# Altium PCB LED_PCB_LONG.PcbDoc
Units mil, origin at the board's own origin, x right, y up, seen from the top; angles counter-clockwise.
Board outline 11604 x 2990 mil, 2 copper layers (Top Layer, Bottom Layer); 73 components, 41 nets, 228 pads, 278 vias.
Unrouted connection lines stored in the file: 28.
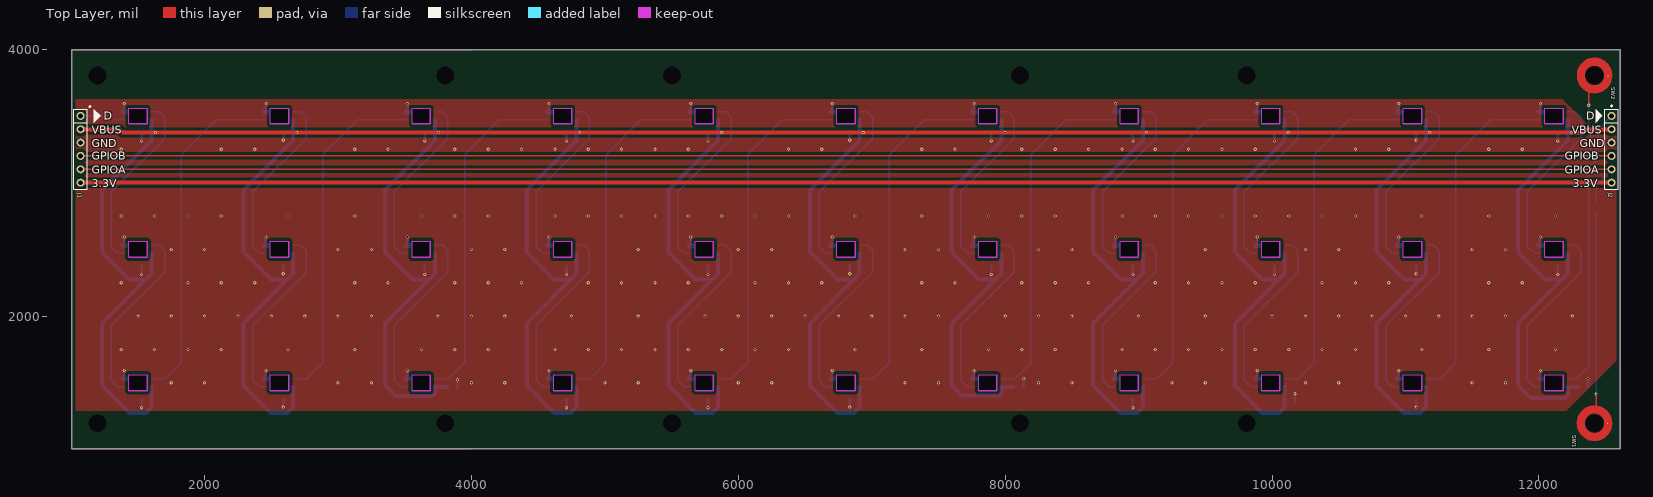
[diagram p0: Top Layer view]
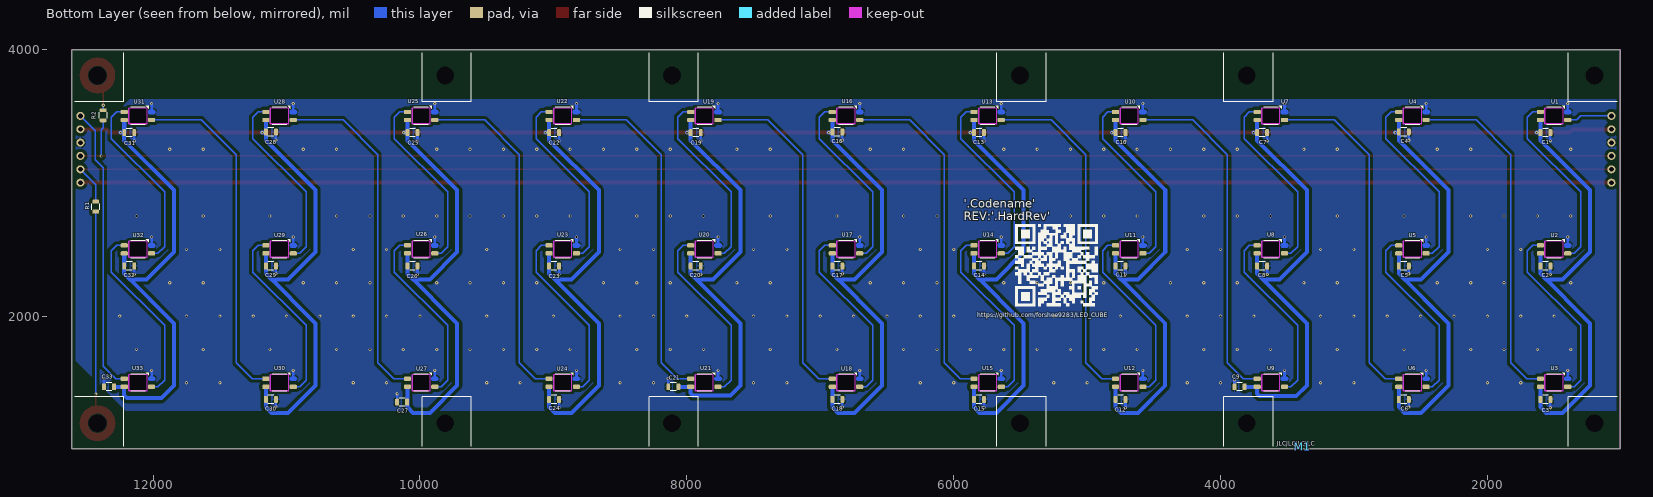
[diagram p1: Bottom Layer view, seen from below]

## Layer stack, top to bottom
Top Solder: solder mask 0.4, Solder Resist, Dk 3.5
Top Layer: signal copper 1.4
Dielectric 1: dielectric 12.6, FR-4, Dk 4.8
Bottom Layer: signal copper 1.4
Bottom Solder: solder mask 0.4, Solder Resist, Dk 3.5

## Board outline
1005,1005 1005,3995 12609,3995 12609,1005
cut-out: 3554.8,1559.05 3690.8,1559.05 3690.8,1440.94 3554.8,1440.94
cut-out: 12046,3559.05 12182,3559.05 12182,3440.94 12046,3440.94
cut-out: 12046,1559.05 12182,1559.05 12182,1440.94 12046,1440.94
cut-out: 12046,2559.05 12182,2559.05 12182,2440.94 12046,2440.94
cut-out: 10984.6,3559.05 11120.6,3559.05 11120.6,3440.94 10984.6,3440.94
cut-out: 10984.6,1559.05 11120.6,1559.05 11120.6,1440.94 10984.6,1440.94
cut-out: 10984.6,2559.05 11120.6,2559.05 11120.6,2440.94 10984.6,2440.94
cut-out: 9923.2,3559.05 10059.2,3559.05 10059.2,3440.94 9923.2,3440.94
cut-out: 9923.2,1559.05 10059.2,1559.05 10059.2,1440.94 9923.2,1440.94
cut-out: 9923.2,2559.05 10059.2,2559.05 10059.2,2440.94 9923.2,2440.94
cut-out: 8861.8,3559.05 8997.8,3559.05 8997.8,3440.94 8861.8,3440.94
cut-out: 8861.8,1559.05 8997.8,1559.05 8997.8,1440.94 8861.8,1440.94
cut-out: 8861.8,2559.05 8997.8,2559.05 8997.8,2440.94 8861.8,2440.94
cut-out: 7800.4,3559.05 7936.4,3559.05 7936.4,3440.94 7800.4,3440.94
cut-out: 7800.4,1559.05 7936.4,1559.05 7936.4,1440.94 7800.4,1440.94
cut-out: 7800.4,2559.05 7936.4,2559.05 7936.4,2440.94 7800.4,2440.94
cut-out: 6739,3559.05 6875,3559.05 6875,3440.94 6739,3440.94
cut-out: 6739,1559.05 6875,1559.05 6875,1440.94 6739,1440.94
cut-out: 6739,2559.05 6875,2559.05 6875,2440.94 6739,2440.94
cut-out: 5677.6,3559.05 5813.6,3559.05 5813.6,3440.94 5677.6,3440.94
cut-out: 5677.6,1559.05 5813.6,1559.05 5813.6,1440.94 5677.6,1440.94
cut-out: 5677.6,2559.05 5813.6,2559.05 5813.6,2440.94 5677.6,2440.94
cut-out: 4616.2,3559.05 4752.2,3559.05 4752.2,3440.94 4616.2,3440.94
cut-out: 4616.2,1559.05 4752.2,1559.05 4752.2,1440.94 4616.2,1440.94
cut-out: 4616.2,2559.05 4752.2,2559.05 4752.2,2440.94 4616.2,2440.94
cut-out: 3554.8,3559.05 3690.8,3559.05 3690.8,3440.94 3554.8,3440.94
cut-out: 3554.8,2559.05 3690.8,2559.05 3690.8,2440.94 3554.8,2440.94
cut-out: 2493.4,2559.05 2629.4,2559.05 2629.4,2440.94 2493.4,2440.94
cut-out: 2493.4,1559.05 2629.4,1559.05 2629.4,1440.94 2493.4,1440.94
cut-out: 1432,1559.05 1568,1559.05 1568,1440.94 1432,1440.94
cut-out: 1432,2559.05 1568,2559.05 1568,2440.94 1432,2440.94
cut-out: 2493.4,3559.05 2629.4,3559.05 2629.4,3440.94 2493.4,3440.94
cut-out: 1432,3559.05 1568,3559.05 1568,3440.94 1432,3440.94
cut-out: 1432,3559.05 1568,3559.05 1568,3440.94 1432,3440.94

## Design rules (kind name [scope] priority, off if disabled: settings)
Clearance Clearance_Poly [All vs InPoly] p1: gap=25 ignorepadtopadclearanceinfootprint=FALSE
Clearance [All] p2: gap=5 ignorepadtopadclearanceinfootprint=FALSE except(0: Arc-Hole Track-Hole SMDPad-Hole THPad-Hole Via-Hole Fill-Hole Poly-Hole Region-Hole Text-Hole)
HoleSize [All] p1: absolutevalues=TRUE maxlimit=99999 minlimit=1 maxpercent=80.000 minpercent=20.000
PlaneConnect [All] p1: pad.planeconnectstyle=Relief pad.reliefexpansion=20 pad.reliefentries=4 pad.reliefconductorwidth=10 pad.reliefairgap=10 via.planeconnectstyle=Direct via.reliefexpansion=20 via.reliefentries=4 via.reliefconductorwidth=10 via.reliefairgap=10
PolygonConnect [All] p1: thpad.connectstyle=Relief thpad.reliefconductorwidth=10 thpad.reliefentries=4 thpad.polygonreliefangle="90 Angle" thpad.airgapwidth=10 smdpad.connectstyle=Relief smdpad.reliefconductorwidth=10 smdpad.reliefentries=4 smdpad.polygonreliefangle="90 Angle" smdpad.airgapwidth=10 via.connectstyle=Direct via.reliefconductorwidth=10 via.reliefentries=4 via.polygonreliefangle="90 Angle" via.airgapwidth=10
RoutingVias [All] p1: holewidth=28 width=50 viastyle="Through Hole" minholewidth=28 minwidth=50 maxholewidth=28 maxwidth=50
SilkToSolderMaskClearance [IsPad] p1: minsilkscreentomaskgap=0 clearancetoexposedcopper=TRUE
SolderMaskExpansion [All] p1: expansion=4 istentingtop=FALSE
SupplyNets "Schematic Supply Nets_2" [InNet('3.3V')] p1: voltage=0.000
SupplyNets "Schematic Supply Nets_1" [InNet('USB_VBUS')] p2: voltage=0.000
SupplyNets "Schematic Supply Nets" [InNet('GND')] p3: voltage=0.000
Width [All] p1: maxlimit=10000 minlimit=6 preferedwidth=10
27 further rules are at their usual default settings.

## Components (designator, comment, footprint, x,y, rotation, side; value= is the part's Value field where it differs from the comment)
C1 "0.1µF" Chip0805 1565,3375 r0 bottom
C2 "0.1µF" Chip0805 1565,2375 r0 bottom
C3 "0.1µF" Chip0805 1565,1375 r0 bottom
C4 "0.1µF" Chip0805 2626.4,3380 r0 bottom
C5 "0.1µF" Chip0805 2626.4,2375 r0 bottom
C6 "0.1µF" Chip0805 2626.4,1375 r0 bottom
C7 "0.1µF" Chip0805 3687.8,3375 r0 bottom
C8 "0.1µF" Chip0805 3687.8,2375 r0 bottom
C9 "0.1µF" Chip0805 3857.2,1470 r180 bottom
C10 "0.1µF" Chip0805 4749.2,3375 r0 bottom
C11 "0.1µF" Chip0805 4749.2,2375 r0 bottom
C12 "0.1µF" Chip0805 4749.2,1375 r0 bottom
C13 "0.1µF" Chip0805 5810.6,3375 r0 bottom
C14 "0.1µF" Chip0805 5810.6,2375 r0 bottom
C15 "0.1µF" Chip0805 5810.6,1375 r0 bottom
C16 "0.1µF" Chip0805 6872,3380 r0 bottom
C17 "0.1µF" Chip0805 6872,2375 r0 bottom
C18 "0.1µF" Chip0805 6872,1375 r0 bottom
C19 "0.1µF" Chip0805 7933.4,3375 r0 bottom
C20 "0.1µF" Chip0805 7933.4,2375 r0 bottom
C21 "0.1µF" Chip0805 8101.6,1470 r180 bottom
C22 "0.1µF" Chip0805 8994.8,3375 r0 bottom
C23 "0.1µF" Chip0805 8994.8,2375 r0 bottom
C24 "0.1µF" Chip0805 8994.8,1375 r0 bottom
C25 "0.1µF" Chip0805 10056.2,3375 r0 bottom
C26 "0.1µF" Chip0805 10056.2,2375 r0 bottom
C27 "0.1µF" Chip0805 10133.8,1355 r180 bottom
C28 "0.1µF" Chip0805 11117.6,3380 r0 bottom
C29 "0.1µF" Chip0805 11117.6,2375 r0 bottom
C30 "0.1µF" Chip0805 11117.6,1375 r0 bottom
C31 "0.1µF" Chip0805 12179,3375 r0 bottom
C32 "0.1µF" Chip0805 12179,2375 r0 bottom
C33 "0.1µF" Chip0805 12331,1470 r180 bottom
J1 "HEADER_1x6_NO_BOM" HEADER_1x6_100mil_NP 1070,3250 r270 top locked
J2 "HEADER_1x6_NO_BOM" HEADER_1x6_100mil_NP 12545,3250 r270 top
M1 "JLC_NUMBER" JLC_NUMBER 3385,1020 r180 bottom
R1 "0" Chip0805 12430,2820 r90 bottom
R2 "0" Chip0805 12375,3505 r270 bottom
SW1 "TOUCH_PAD_NO_BOM" TENTED_PAD_5mil 12514,1195 r0 top
SW2 "TOUCH_PAD_NO_BOM" TENTED_PAD_5mil 12519,3800 r0 top
U1 "SK6812MINI-E" SK6812MINI-E 1500,3500 r0 bottom
U2 "SK6812MINI-E" SK6812MINI-E 1500,2500 r0 bottom
U3 "SK6812MINI-E" SK6812MINI-E 1500,1500 r0 bottom
U4 "SK6812MINI-E" SK6812MINI-E 2561.4,3500 r0 bottom
U5 "SK6812MINI-E" SK6812MINI-E 2561.4,2500 r0 bottom
U6 "SK6812MINI-E" SK6812MINI-E 2561.4,1500 r0 bottom
U7 "SK6812MINI-E" SK6812MINI-E 3622.8,3500 r0 bottom
U8 "SK6812MINI-E" SK6812MINI-E 3622.8,2500 r0 bottom
U9 "SK6812MINI-E" SK6812MINI-E 3622.8,1500 r0 bottom
U10 "SK6812MINI-E" SK6812MINI-E 4684.2,3500 r0 bottom
U11 "SK6812MINI-E" SK6812MINI-E 4684.2,2500 r0 bottom
U12 "SK6812MINI-E" SK6812MINI-E 4684.2,1500 r0 bottom
U13 "SK6812MINI-E" SK6812MINI-E 5745.6,3500 r0 bottom
U14 "SK6812MINI-E" SK6812MINI-E 5745.6,2500 r0 bottom
U15 "SK6812MINI-E" SK6812MINI-E 5745.6,1500 r0 bottom
U16 "SK6812MINI-E" SK6812MINI-E 6807,3500 r0 bottom
U17 "SK6812MINI-E" SK6812MINI-E 6807,2500 r0 bottom
U18 "SK6812MINI-E" SK6812MINI-E 6807,1500 r0 bottom
U19 "SK6812MINI-E" SK6812MINI-E 7868.4,3500 r0 bottom
U20 "SK6812MINI-E" SK6812MINI-E 7868.4,2500 r0 bottom
U21 "SK6812MINI-E" SK6812MINI-E 7868.4,1500 r0 bottom
U22 "SK6812MINI-E" SK6812MINI-E 8929.8,3500 r0 bottom
U23 "SK6812MINI-E" SK6812MINI-E 8929.8,2500 r0 bottom
U24 "SK6812MINI-E" SK6812MINI-E 8929.8,1500 r0 bottom
U25 "SK6812MINI-E" SK6812MINI-E 9991.2,3500 r0 bottom
U26 "SK6812MINI-E" SK6812MINI-E 9991.2,2500 r0 bottom
U27 "SK6812MINI-E" SK6812MINI-E 9991.2,1500 r0 bottom
U28 "SK6812MINI-E" SK6812MINI-E 11052.6,3500 r0 bottom
U29 "SK6812MINI-E" SK6812MINI-E 11052.6,2500 r0 bottom
U30 "SK6812MINI-E" SK6812MINI-E 11052.6,1500 r0 bottom
U31 "SK6812MINI-E" SK6812MINI-E 12114,3500 r0 bottom
U32 "SK6812MINI-E" SK6812MINI-E 12114,2500 r0 bottom
U33 "SK6812MINI-E" SK6812MINI-E 12114,1500 r0 bottom

## Footprints (in the part's own frame and the unit in brackets; to place one, negate y for a bottom-side part, rotate by r counter-clockwise, add the part's x,y. Pads: shape width x height; smd on the part's side, far side on the other; paste and mask are expansions set on the pad)
Chip0805 [mm] "Chip Resistor, 2-Leads, Body 2.05x1.25mm, IPC Medium Density"
  rrect50% 0.75x1.3 smd: 1(-0.955,0) 2(0.955,0)
  silkscreen extent -0.55,-0.77 0.55,0.77, body extent -0.95,-0.55 0.95,0.55, height 0.5
HEADER_1x6_100mil_NP [mil]
  round 60 hole 35: 1(-250,0) 2(-150,0) 3(-50,0) 4(50,0) 5(150,0) 6(250,0)
  silkscreen extent -325,-50 300,75
JLC_NUMBER [mil]
SK6812MINI-E [mil]
  rrect50% 54x32.28 smd: 1(102.53,30) 2(102.53,-30) 4(-102.53,30)
  round 1 smd: 3(-102.53,-30)
  Top Layer region: -83.6,-13.86 -75.53,-21.93 -75.53,-38.07 -83.6,-46.14 -121.46,-46.14 -129.53,-38.07 -129.53,-21.93 -121.46,-13.86
  Keep-Out Layer lines w1.97: -68,59.06 68,59.06 68,-59.06 -68,-59.06 -68,59.06
  silkscreen extent -80,-75 55,65, body extent -116,-55 116,55, height 38
TENTED_PAD_5mil [mil]
  round 5 smd mask+4: 1(0,0)

## Part data
C1 C2 C3 C4 C5 C6 C7 C8 C9 C10 C11 C12 C13 C14 C15 C16 C17 C18 C19 C20 C21 C22 C23 C24 C25 C26 C27 C28 C29 C30 C31 C32 C33: library part C2012X7T2E104K125AA, "CAP CER 0.1UF 250V 10% X7T 0805", Manufacturer="TDK Corporation", Operating Temperature="-55°C ~ 125°C", Package / Case="0805 (2012 Metric)", Ratings=-, Supplier Part Number 1=445-7749-1-ND, Temperature Coefficient=X7T, Tolerance=±10%, Voltage=250V, Applications="General Purpose", Capacitance=0.1µF, Features=-, Height - Seated (Max)=-, HelpURL=http://product.tdk.com/capacitor/mlcc/en/documents/mlcc_commercial_midvoltage_en.pdf, Lead Spacing=-, Lead Style=-, Manufacturer Part Number=C2012X7T2E104K125AA, Mounting Type="Surface Mount, MLCC", PartNumber=C2012X7T2E104K125AA, Series=C, Size / Dimension="0.079\" L x 0.049\" W (2.00mm x 1.25mm)", Supplier 1=Digi-Key, Supplier 2=Mouser, Thickness (Max)="0.057\" (1.45mm)"
M1: "JLC Order Number Location", Manufacturer Part Number=JLC_NUMBER, PartNumber=JLC_NUMBER
R1 R2: library part CRCW08050000Z0EA, "RES 0.0 OHM 1/8W JUMP 0805 SMD", Manufacturer="Vishay Dale", Package / Case="0805 (2012 Metric)", Power (Watts)="0.125W, 1/8W", Supplier Part Number 1=541-0.0ACT-ND, Temperature Coefficient=-, Tolerance=Jumper, Composition="Thick Film", Features="Automotive AEC-Q200 Qualified", Height="0.020\" (0.50mm)", HelpURL=http://www.vishay.com/doc?20035, Manufacturer Part Number=CRCW08050000Z0EA, Number of Terminations=2, PartNumber=CRCW08050000Z0EA, Resistance=0, Series=CRCW, Size / Dimension="0.079\" L x 0.049\" W (2.00mm x 1.25mm)", Supplier 1=Digi-Key, Supplier 2=Mouser, Supplier Device Package="0805 (2012 Metric)"
U1 U2 U3 U4 U5 U6 U7 U8 U9 U10 U11 U12 U13 U14 U15 U16 U17 U18 U19 U20 U21 U22 U23 U24 U25 U26 U27 U28 U29 U30 U31 U32 U33: "Addressable RGB LED", Manufacturer="Adafruit Industries LLC", Supplier Part Number 1=1528-4960-ND, Datasheets=https://cdn-shop.adafruit.com/product-files/4960/4960_SK6812MINI-E_REV02_EN.pdf, Manufacturer Part Number=SK6812MINI-E, PartNumber=SK6812MINI-E, Supplier 1=Digi-Key
J1 J2: Manufacturer Part Number=HEADER_1x6_NO_BOM, PartNumber=HEADER_1x6_NO_BOM
SW1 SW2: Manufacturer Part Number=TOUCH_PAD_NO_BOM, PartNumber=TOUCH_PAD_NO_BOM

## Free pads (board coordinates)
  round 10 hole 133.86 unplated: 0(1196.85,1196.85) 0(1196.85,3803.15) 0(3803.15,1196.85) 0(3803.15,3803.15) 0(5503.85,1196.85) 0(5503.85,3803.15) 0(8110.15,1196.85) 0(8110.15,3803.15) 0(9810.85,1196.85) 0(9810.85,3803.15) 0(12417.15,1196.85) 0(12417.15,3803.15)

## Via types
v1: diameter 24, hole 12, Top Layer to Bottom Layer, tented both sides, 278 vias

## Nets (pads, with @x,y where several pads share a name; then routed paths per layer and width w, separated by ;. In a path a pad name is that pad's centre, name@x,y a point inside that pad or via, vN(x,y) a via of type N, cw(c..) or ccw(c..) an arc to the next point about the centre after c; other vN are vias at no path point)
3.3V: J1.6 J2.6 | length 11475
  Top Layer w30: J1.6 J2.6
DATA_IN: J1.1 U1.4 | length 339.9
  Bottom Layer w10: J1.1 1300,3500 1330,3470 U1.4
DATA_OUT: J2.1 U33.2 | length 2143.2
  Bottom Layer w10: U33.2 12280,1530 12375,1625 12375,3110 12435,3170 12435,3390 J2.1
GND: C1.1 C2.1 C3.1 C4.1 C5.1 C6.1 C7.1 C8.1 C9.1 C10.1 C11.1 C12.1 C13.1 C14.1 C15.1 C16.1 C17.1 C18.1 C19.1 C20.1 C21.1 C22.1 C23.1 C24.1 C25.1 C26.1 C27.1 C28.1 C29.1 C30.1 C31.1 C32.1 C33.1 J1.3 J2.3 U1.3 U2.3 U3.3 U4.3 U5.3 U6.3 U7.3 U8.3 U9.3 U10.3 U11.3 U12.3 U13.3 U14.3 U15.3 U16.3 U17.3 U18.3 U19.3 U20.3 U21.3 U22.3 U23.3 U24.3 U25.3 U26.3 U27.3 U28.3 U29.3 U30.3 U31.3 U32.3 U33.3 | length 4122.7
  Bottom Layer w20: U3.3 v1(1397.47,1592.53) ; U2.3 v1(1397.47,2592.53) ; U1.3 v1(1397.47,3592.53) ; v1(1527.4,1312.6) C3.1 ; v1(1527.4,2312.6) C2.1 ; v1(1527.4,3312.6) C1.1 ; U6.3 v1(2458.87,1592.53) ; U5.3 v1(2458.87,2592.53) ; U4.3 v1(2458.87,3592.53) ; v1(2588.8,1317.6) C6.1@2588.8,1380 ; v1(2588.8,2317.6) C5.1@2588.8,2380 ; v1(2588.8,3317.6) C4.1 ; U9.3 v1(3520.27,1592.53) ; U8.3 v1(3520.27,2592.53) ; U7.3 v1(3520.27,3592.53) ; v1(3650.2,2312.6) C8.1 ; v1(3650.2,3312.6) C7.1 ; C9.1@3894.8,1460 v1(3894.8,1522.4) ; U12.3 v1(4581.67,1592.53) ; U11.3 v1(4581.67,2592.53) ; U10.3 v1(4581.67,3592.53) ; v1(4711.6,1312.6) C12.1 ; v1(4711.6,2312.6) C11.1 ; v1(4711.6,3312.6) C10.1 ; U15.3 v1(5643.07,1592.53) ; U14.3 v1(5643.07,2592.53) ; U13.3 v1(5643.07,3592.53) ; v1(5773,1312.6) C15.1 ; v1(5773,2312.6) C14.1 ; v1(5773,3312.6) C13.1 ; U18.3 v1(6704.47,1592.53) ; U17.3 v1(6704.47,2592.53) ; U16.3 v1(6704.47,3592.53) ; v1(6834.4,1317.6) C18.1@6834.4,1380 ; v1(6834.4,2317.6) C17.1@6834.4,2380 ; v1(6834.4,3317.6) C16.1 ; U21.3 v1(7765.87,1592.53) ; U20.3 v1(7765.87,2592.53) ; U19.3 v1(7765.87,3592.53) ; v1(7895.8,2312.6) C20.1 ; v1(7895.8,3312.6) C19.1 ; C21.1 v1(8139.2,1532.4) ; U24.3 v1(8827.27,1592.53) ; U23.3 v1(8827.27,2592.53) ; U22.3 v1(8827.27,3592.53) ; v1(8957.2,1312.6) C24.1 ; v1(8957.2,2312.6) C23.1 ; v1(8957.2,3312.6) C22.1 ; U27.3 v1(9888.67,1592.53) ; U26.3 v1(9888.67,2592.53) ; U25.3 v1(9888.67,3592.53) ; v1(10018.6,2312.6) C26.1 ; v1(10018.6,3312.6) C25.1 ; C27.1 v1(10171.4,1417.4) ; U30.3 v1(10950.07,1592.53) ; U29.3 v1(10950.07,2592.53) ; U28.3 v1(10950.07,3592.53) ; v1(11080,1317.6) C30.1@11080,1380 ; v1(11080,2317.6) C29.1@11080,2380 ; v1(11080,3317.6) C28.1 ; U33.3 v1(12011.47,1592.53) ; U32.3 v1(12011.47,2592.53) ; U31.3 v1(12011.47,3592.53) ; v1(12141.4,2312.6) C32.1 ; v1(12141.4,3312.6) C31.1 ; C33.1 v1(12368.6,1532.4)
  other v1: 1750,1500 2000,1500 3000,1500 3250,1500 4000,1500 4250,1500 5000,1500 5250,1500 6000,1500 6250,1500 7250,1500 7500,1500 8250,1500 8500,1500 9250,1500 9500,1500 10250,1500 10500,1500 11500,1500 11750,1500 1375,1750 1625,1750 1875,1750 2125,1750 2625,1750 3125,1750 3625,1750 3875,1750 4125,1750 4625,1750 4875,1750 5125,1750 5375,1750 5625,1750 5875,1750 6125,1750 6375,1750 6875,1750 7375,1750 7875,1750 8125,1750 8375,1750 8875,1750 9125,1750 9375,1750 9625,1750 9875,1750 10125,1750 10375,1750 10625,1750 11125,1750 11625,1750 12125,1750 1500,2000 1750,2000 2000,2000 2250,2000 2500,2000 2750,2000 3000,2000 3250,2000 3750,2000 4000,2000 4250,2000 4750,2000 5250,2000 5750,2000 6000,2000 6250,2000 6500,2000 6750,2000 7000,2000 7250,2000 7500,2000 8000,2000 8250,2000 8500,2000 9000,2000 9500,2000 10000,2000 10250,2000 10500,2000 10750,2000 11000,2000 11250,2000 11500,2000 11750,2000 12250,2000 1375,2250 1875,2250 2125,2250 2375,2250 3125,2250 3375,2250 3875,2250 4125,2250 4375,2250 4875,2250 5125,2250 5375,2250 5625,2250 6125,2250 6375,2250 6625,2250 7375,2250 7625,2250 8125,2250 8375,2250 8625,2250 9125,2250 9375,2250 9625,2250 9875,2250 10375,2250 10625,2250 10875,2250 11625,2250 11875,2250 1750,2500 2000,2500 3000,2500 3250,2500 4000,2500 4250,2500 5250,2500 6000,2500 6250,2500 7250,2500 7500,2500 8250,2500 8500,2500 9500,2500 10250,2500 10500,2500 11500,2500 11750,2500 1375,2750 1625,2750 1875,2750 2125,2750 2625,2750 3125,2750 3625,2750 3875,2750 4125,2750 4625,2750 4875,2750 5125,2750 5375,2750 5625,2750 5875,2750 6125,2750 6375,2750 6875,2750 7375,2750 7875,2750 8125,2750 8375,2750 8875,2750 9125,2750 9375,2750 9625,2750 9875,2750 10125,2750 10375,2750 10625,2750 11125,2750 11625,2750 12125,2750 1375,3250 2125,3250 2375,3250 3125,3250 3375,3250 3875,3250 4125,3250 4375,3250 4625,3250 4875,3250 5125,3250 5375,3250 5625,3250 6375,3250 6625,3250 7375,3250 7625,3250 8125,3250 8375,3250 8625,3250 8875,3250 9125,3250 9375,3250 9625,3250 9875,3250 10625,3250 10875,3250 11625,3250 11875,3250
GPIO_A: J1.5 J2.5 R1.2 | length 11765
  Top Layer w10: J1.5 J2.5
  Bottom Layer w10: R1.2 12430,2985 J2.5
GPIO_B: J1.4 J2.4 R2.2 | length 11748.6
  Top Layer w10: J1.4 J2.4
  Bottom Layer w10: R2.2 12375,3410 12390,3395 v1(12390,3200)
NetU1_2: U1.2 U2.4 | length 1367.9
  Bottom Layer w10: U2.4 1350,2470 1300,2520 1300,2930 1700,3330 1700,3490 1660,3530 U1.2
NetU2_2: U2.2 U3.4 | length 1367.9
  Bottom Layer w10: U3.4 1350,1470 1300,1520 1300,1930 1700,2330 1700,2490 1660,2530 U2.2
NetU3_2: U3.2 U4.4 | length 2573.7
  Bottom Layer w10: U3.2 1705,1530 1825,1650 1825,3210 2085,3470 U4.4
NetU4_2: U4.2 U5.4 | length 1367.9
  Bottom Layer w10: U5.4 2411.4,2470 2361.4,2520 2361.4,2930 2761.4,3330 2761.4,3490 2721.4,3530 U4.2
NetU5_2: U5.2 U6.4 | length 1367.9
  Bottom Layer w10: U6.4 2411.4,1470 2361.4,1520 2361.4,1930 2761.4,2330 2761.4,2490 2721.4,2530 U5.2
NetU6_2: U6.2 U7.4 | length 2573.7
  Bottom Layer w10: U6.2 2766.4,1530 2886.4,1650 2886.4,3210 3146.4,3470 U7.4
NetU7_2: U7.2 U8.4 | length 1367.9
  Bottom Layer w10: U8.4 3472.8,2470 3422.8,2520 3422.8,2930 3822.8,3330 3822.8,3490 3782.8,3530 U7.2
NetU8_2: U8.2 U9.4 | length 1367.9
  Bottom Layer w10: U9.4 3472.8,1470 3422.8,1520 3422.8,1930 3822.8,2330 3822.8,2490 3782.8,2530 U8.2
NetU9_2: U9.2 U10.4 | length 2573.7
  Bottom Layer w10: U9.2 3827.8,1530 3947.8,1650 3947.8,3210 4207.8,3470 U10.4
NetU10_2: U10.2 U11.4 | length 1367.9
  Bottom Layer w10: U11.4 4534.2,2470 4484.2,2520 4484.2,2930 4884.2,3330 4884.2,3490 4844.2,3530 U10.2
NetU11_2: U11.2 U12.4 | length 1367.9
  Bottom Layer w10: U12.4 4534.2,1470 4484.2,1520 4484.2,1930 4884.2,2330 4884.2,2490 4844.2,2530 U11.2
NetU12_2: U12.2 U13.4 | length 2573.7
  Bottom Layer w10: U12.2 4889.2,1530 5009.2,1650 5009.2,3210 5269.2,3470 U13.4
NetU13_2: U13.2 U14.4 | length 1367.9
  Bottom Layer w10: U14.4 5595.6,2470 5545.6,2520 5545.6,2930 5945.6,3330 5945.6,3490 5905.6,3530 U13.2
NetU14_2: U14.2 U15.4 | length 1367.9
  Bottom Layer w10: U15.4 5595.6,1470 5545.6,1520 5545.6,1930 5945.6,2330 5945.6,2490 5905.6,2530 U14.2
NetU15_2: U15.2 U16.4 | length 2573.7
  Bottom Layer w10: U15.2 5950.6,1530 6070.6,1650 6070.6,3210 6330.6,3470 U16.4
NetU16_2: U16.2 U17.4 | length 1367.9
  Bottom Layer w10: U17.4 6657,2470 6607,2520 6607,2930 7007,3330 7007,3490 6967,3530 U16.2
NetU17_2: U17.2 U18.4 | length 1367.9
  Bottom Layer w10: U18.4 6657,1470 6607,1520 6607,1930 7007,2330 7007,2490 6967,2530 U17.2
NetU18_2: U18.2 U19.4 | length 2573.7
  Bottom Layer w10: U18.2 7012,1530 7132,1650 7132,3210 7392,3470 U19.4
NetU19_2: U19.2 U20.4 | length 1367.9
  Bottom Layer w10: U20.4 7718.4,2470 7668.4,2520 7668.4,2930 8068.4,3330 8068.4,3490 8028.4,3530 U19.2
NetU20_2: U20.2 U21.4 | length 1367.9
  Bottom Layer w10: U21.4 7718.4,1470 7668.4,1520 7668.4,1930 8068.4,2330 8068.4,2490 8028.4,2530 U20.2
NetU21_2: U21.2 U22.4 | length 2573.7
  Bottom Layer w10: U21.2 8073.4,1530 8193.4,1650 8193.4,3210 8453.4,3470 U22.4
NetU22_2: U22.2 U23.4 | length 1367.9
  Bottom Layer w10: U23.4 8779.8,2470 8729.8,2520 8729.8,2930 9129.8,3330 9129.8,3490 9089.8,3530 U22.2
NetU23_2: U23.2 U24.4 | length 1367.9
  Bottom Layer w10: U24.4 8779.8,1470 8729.8,1520 8729.8,1930 9129.8,2330 9129.8,2490 9089.8,2530 U23.2
NetU24_2: U24.2 U25.4 | length 2573.7
  Bottom Layer w10: U24.2 9134.8,1530 9254.8,1650 9254.8,3210 9514.8,3470 U25.4
NetU25_2: U25.2 U26.4 | length 1367.9
  Bottom Layer w10: U26.4 9841.2,2470 9791.2,2520 9791.2,2930 10191.2,3330 10191.2,3490 10151.2,3530 U25.2
NetU26_2: U26.2 U27.4 | length 1367.9
  Bottom Layer w10: U27.4 9841.2,1470 9791.2,1520 9791.2,1930 10191.2,2330 10191.2,2490 10151.2,2530 U26.2
NetU27_2: U27.2 U28.4 | length 2573.7
  Bottom Layer w10: U27.2 10196.2,1530 10316.2,1650 10316.2,3210 10576.2,3470 U28.4
NetU28_2: U28.2 U29.4 | length 1367.9
  Bottom Layer w10: U29.4 10902.6,2470 10852.6,2520 10852.6,2930 11252.6,3330 11252.6,3490 11212.6,3530 U28.2
NetU29_2: U29.2 U30.4 | length 1367.9
  Bottom Layer w10: U30.4 10902.6,1470 10852.6,1520 10852.6,1930 11252.6,2330 11252.6,2490 11212.6,2530 U29.2
NetU30_2: U30.2 U31.4 | length 2573.7
  Bottom Layer w10: U30.2 11257.6,1530 11377.6,1650 11377.6,3210 11637.6,3470 U31.4
NetU31_2: U31.2 U32.4 | length 1367.9
  Bottom Layer w10: U32.4 11964,2470 11914,2520 11914,2930 12314,3330 12314,3490 12274,3530 U31.2
NetU32_2: U32.2 U33.4 | length 1367.9
  Bottom Layer w10: U33.4 11964,1470 11914,1520 11914,1930 12314,2330 12314,2490 12274,2530 U32.2
TOUCH_1: R1.1 SW1.1 | length 2131.3
  Top Layer w10: 12428.92,1299.34 12429,1299.42 v1(12429,1415)
  Top Layer w60: 12417.15,1093.68 ccw(c12417.15,1196.85) 12428.92,1299.34 ccw(c12417.15,1196.85) 12417.15,1093.68
  Bottom Layer w10: v1(12429,1415) R1.1@12429,2782.4
TOUCH_2: R2.1 SW2.1 | length 810.7
  Top Layer w10: v1(12374,3580) 12374,3704.68
  Top Layer w60: 12363.88,3714.8 cw(c12417.15,3803.15) 12417.15,3699.98 cw(c12417.15,3803.15) 12363.88,3714.8
  Bottom Layer w10: v1(12374,3580) 12374,3543.6 R2.1
USB_VBUS: C1.2 C2.2 C3.2 C4.2 C5.2 C6.2 C7.2 C8.2 C9.2 C10.2 C11.2 C12.2 C13.2 C14.2 C15.2 C16.2 C17.2 C18.2 C19.2 C20.2 C21.2 C22.2 C23.2 C24.2 C25.2 C26.2 C27.2 C28.2 C29.2 C30.2 C31.2 C32.2 C33.2 J1.2 J2.2 U1.1 U2.1 U3.1 U4.1 U5.1 U6.1 U7.1 U8.1 U9.1 U10.1 U11.1 U12.1 U13.1 U14.1 U15.1 U16.1 U17.1 U18.1 U19.1 U20.1 U21.1 U22.1 U23.1 U24.1 U25.1 U26.1 U27.1 U28.1 U29.1 U30.1 U31.1 U32.1 U33.1 | length 50511.8
  Top Layer w30: J1.2 1360,3400 1385,3375 v1(1630,3375) v1(2691.4,3375) v1(3752.8,3375) v1(4814.2,3375) v1(12244,3375) 12330,3375 12355,3400 J2.2
  Bottom Layer w30: U3.1@1602.56,1469.96 1602.6,1469.93 C3.2 C3.2 1602.63,1320.56 ; U2.1 U2.1@1602.56,2469.96 ; U1.1 1602.56,3469.96 C1.2 C1.2 ; 1602.6,2317.6 1560,2275 1435,2275 1230,2480 1230,2945 1602.6,3317.6 C1.2 ; 1602.6,2320.6 C2.2 ; 1602.63,1317.56 1560.04,1274.96 1435.04,1274.96 1230.04,1479.96 1230.04,1944.96 1602.63,2317.56 C2.2 C2.2 ; v1(1630,3375) C1.2 ; U6.1@2663.96,1469.96 2664,1469.93 C6.2 C6.2 2664.03,1320.56 ; U5.1 U5.1@2663.96,2469.96 ; U4.1 2663.96,3469.96 2663.96,3375.03 C4.2@2664,3375 ; 2664,2317.6 2621.4,2275 2496.4,2275 2291.4,2480 2291.4,2945 2664,3317.6 C4.2@2664,3375 ; 2664,2320.6 C5.2 ; 2664.03,1317.56 2621.44,1274.96 2496.44,1274.96 2291.44,1479.96 2291.44,1944.96 2664.03,2317.56 C5.2 C5.2 ; v1(2691.4,3375) C4.2@2664,3375 ; U9.1@3725.36,1469.96 3725.36,1468.89 3725.4,1468.86 3725.4,1417.97 3707.82,1400.4 3432.4,1400.4 3352.84,1479.96 3352.84,1944.96 3725.43,2317.56 C8.2 C8.2 ; U9.1 C9.2 ; U8.1 U8.1@3725.36,2469.96 ; U7.1 3725.36,3469.96 C7.2 C7.2 ; 3725.4,2317.6 3682.8,2275 3557.8,2275 3352.8,2480 3352.8,2945 3725.4,3317.6 C7.2 ; 3725.4,2320.6 C8.2 ; v1(3752.8,3375) C7.2 ; U12.1@4786.76,1469.96 4786.8,1469.93 C12.2 C12.2 4786.83,1320.56 ; U11.1 U11.1@4786.76,2469.96 ; U10.1 4786.76,3469.96 C10.2 C10.2 ; 4786.8,2317.6 4744.2,2275 4619.2,2275 4414.2,2480 4414.2,2945 4786.8,3317.6 C10.2 ; 4786.8,2320.6 C11.2 ; 4786.83,1317.56 4744.24,1274.96 4619.24,1274.96 4414.24,1479.96 4414.24,1944.96 4786.83,2317.56 C11.2 C11.2 ; v1(4814.2,3375) C10.2 ; U15.1@5848.16,1469.96 5848.2,1469.93 C15.2 C15.2 5848.23,1320.56 ; U14.1 U14.1@5848.16,2469.96 ; U13.1 5848.16,3469.96 C13.2 C13.2 ; 5848.2,2317.6 5805.6,2275 5680.6,2275 5475.6,2480 5475.6,2945 5848.2,3317.6 C13.2 ; 5848.2,2320.6 C14.2 ; 5848.23,1317.56 5805.64,1274.96 5680.64,1274.96 5475.64,1479.96 5475.64,1944.96 5848.23,2317.56 C14.2 C14.2 ; v1(5875.6,3375) C13.2 ; U18.1@6909.56,1469.96 6909.6,1469.93 C18.2 C18.2 6909.63,1320.56 ; U17.1 U17.1@6909.56,2469.96 ; U16.1 6909.56,3469.96 6909.56,3375.03 C16.2@6909.6,3375 ; 6909.6,2317.6 6867,2275 6742,2275 6537,2480 6537,2945 6909.6,3317.6 C16.2@6909.6,3375 ; 6909.6,2320.6 C17.2 ; 6909.63,1317.56 6867.04,1274.96 6742.04,1274.96 6537.04,1479.96 6537.04,1944.96 6909.63,2317.56 C17.2 C17.2 ; v1(6937,3375) C16.2@6909.6,3375 ; U20.1 U20.1@7970.96,2469.96 ; U19.1 7970.96,3469.96 C19.2 C19.2 ; 7971,2317.6 7928.4,2275 7803.4,2275 7598.4,2480 7598.4,2945 7971,3317.6 C19.2 ; 7971,2320.6 C20.2 ; v1(7998.4,3375) C19.2 ; C21.2 7971.07,1470 7971.07,1468.93 7971,1468.86 7971,1422.57 7953.43,1405 7673.4,1405 7598.44,1479.96 7598.44,1944.96 7971.03,2317.56 C20.2 C20.2 ; U24.1@9032.36,1469.96 9032.4,1469.93 C24.2 C24.2 9032.43,1320.56 ; U23.1 U23.1@9032.36,2469.96 ; U22.1 9032.36,3469.96 C22.2 C22.2 ; 9032.4,2317.6 8989.8,2275 8864.8,2275 8659.8,2480 8659.8,2945 9032.4,3317.6 C22.2 ; 9032.4,2320.6 C23.2 ; 9032.43,1317.56 8989.84,1274.96 8864.84,1274.96 8659.84,1479.96 8659.84,1944.96 9032.43,2317.56 C23.2 C23.2 ; v1(9059.8,3375) C22.2 ; U26.1 U26.1 ; U25.1 U25.1 C25.2@10093.73,3375.07 ; U27.1 10093.76,1469.96 10093.76,1375.03 10093.8,1375 10093.8,1320.6 ; 10093.76,2317.63 10051.16,2275.03 9926.16,2275.03 9721.16,2480.03 9721.16,2945.03 10093.76,3317.63 C25.2 ; 10093.76,2320.63 C26.2 ; 10093.8,1317.6 10051.2,1275 9926.2,1275 9721.2,1480 9721.2,1945 10093.8,2317.6 C26.2 C26.2 ; v1(10121.16,3375.03) C25.2 ; U30.1@11155.16,1469.96 11155.2,1469.93 C30.2 C30.2 11155.23,1320.56 ; U29.1 U29.1@11155.16,2469.96 ; U28.1 11155.16,3469.96 11155.16,3375.03 C28.2@11155.2,3375 ; 11155.2,2317.6 11112.6,2275 10987.6,2275 10782.6,2480 10782.6,2945 11155.2,3317.6 C28.2@11155.2,3375 ; 11155.2,2320.6 C29.2 ; 11155.23,1317.56 11112.64,1274.96 10987.64,1274.96 10782.64,1479.96 10782.64,1944.96 11155.23,2317.56 C29.2 C29.2 ; v1(11182.6,3375) C28.2@11155.2,3375 ; U33.1@12216.56,1469.96 12216.6,1469.93 12216.6,1406.6 12195,1385 11939,1385 11844.04,1479.96 11844.04,1944.96 12216.63,2317.56 C32.2 C32.2 ; U33.1 C33.2 ; U32.1 U32.1@12216.56,2469.96 ; U31.1 12216.56,3469.96 C31.2 C31.2 ; 12216.6,2317.6 12174,2275 12049,2275 11844,2480 11844,2945 12216.6,3317.6 C31.2 ; 12216.6,2320.6 C32.2 ; v1(12244,3375) C31.2 ; U2.1@1602.56,2469.96 1602.6,2469.93 C2.2 ; U2.1@1602.56,2469.96 C2.2 C2.2 ; U5.1@2663.96,2469.96 C5.2 C5.2 ; U5.1@2663.96,2469.96 2664,2469.93 C5.2 ; U8.1@3725.36,2469.96 C8.2 C8.2 ; U8.1@3725.36,2469.96 3725.4,2469.93 C8.2 ; U11.1@4786.76,2469.96 C11.2 C11.2 ; U11.1@4786.76,2469.96 4786.8,2469.93 C11.2 ; U14.1@5848.16,2469.96 C14.2 C14.2 ; U14.1@5848.16,2469.96 5848.2,2469.93 C14.2 ; U17.1@6909.56,2469.96 C17.2 C17.2 ; U17.1@6909.56,2469.96 6909.6,2469.93 C17.2 ; U20.1@7970.96,2469.96 C20.2 C20.2 ; U20.1@7970.96,2469.96 7971,2469.93 C20.2 ; U23.1@9032.36,2469.96 C23.2 C23.2 ; U23.1@9032.36,2469.96 9032.4,2469.93 C23.2 ; C26.2 10093.76,2469.96 U26.1 ; C26.2@10093.73,2375.07 C26.2 ; C26.2@10093.73,2375.07 U26.1 ; C25.2@10093.73,3375.07 C25.2 ; U29.1@11155.16,2469.96 C29.2 C29.2 ; U29.1@11155.16,2469.96 11155.2,2469.93 C29.2 ; U32.1@12216.56,2469.96 C32.2 C32.2 ; U32.1@12216.56,2469.96 12216.6,2469.93 C32.2

## Polygon pours and split planes (outlines as drawn)
GND on Bottom Layer "GND_L02_P001" (solid, pour order 1): 1005,3625 12175,3625 12355,3445 12610,3445 12610,1694.42 12205.58,1290 1005,1290
GND on Top Layer "GND_L01_P000" (solid, pour order 0): 1005,3625 12175,3625 12355,3445 12610,3445 12610,1694.42 12205.58,1290 1005,1290

## Keep-outs
Keep-Out Layer:
  lines w7.87: 3995,1005 1005,1005 1005,3995 3995,3995 ; 12609,1005 12609,3995

## Silkscreen, mask and mechanical layers (free items; w line width, h text height)
Top Overlay:
  region: 12424.93,3450 12424.93,3550 12474.93,3500
  region: 1170,3450 1170,3550 1220,3500
  text "D" at 1245,3470 h60
  text "D" at 12355,3470 h60
  text "VBUS" at 1155.09,3365 h60
  text "VBUS" at 12245,3365 h60
  text "GND" at 1155.09,3265 h60
  text "GND" at 12304.98,3265 h60
  text "GPIOB" at 1155.09,3170 h60
  text "GPIOB" at 12195.02,3170 h60
  text "GPIOA" at 1155.09,3065 h60
  text "GPIOA" at 12195.02,3065 h60
  text "3.3V" at 1155,2965 h60
  text "3.3V" at 12255,2965 h60
Bottom Overlay:
  drawing of 86 lines, arcs and shapes, not listed
  text "'.Codename'  / REV:'.HardRev'" at 5924.44,2720 h62
  text "https://github.com/forshee9283/LED_CUBE" at 5824,1991.66 h32
Top Solder:
  text "é" at 3036.6,2589.59 h1000
Bottom Solder:
  text "é" at 3223.4,2589.59 h1000
Mechanical 1:
  the board outline again, w7.87

## Text inside footprints (layer, text, board x,y; h text height)
M1: Bottom Overlay "JLCJLCJLCJLC" at 3580.15,1027.87 h33.46
U1: Mechanical 1 "CUT / OUT" at 1450,3550 h30 r180
U2: Mechanical 1 "CUT / OUT" at 1450,2550 h30 r180
U3: Mechanical 1 "CUT / OUT" at 1450,1550 h30 r180
U4: Mechanical 1 "CUT / OUT" at 2511.4,3550 h30 r180
U5: Mechanical 1 "CUT / OUT" at 2511.4,2550 h30 r180
U6: Mechanical 1 "CUT / OUT" at 2511.4,1550 h30 r180
U7: Mechanical 1 "CUT / OUT" at 3572.8,3550 h30 r180
U8: Mechanical 1 "CUT / OUT" at 3572.8,2550 h30 r180
U9: Mechanical 1 "CUT / OUT" at 3572.8,1550 h30 r180
U10: Mechanical 1 "CUT / OUT" at 4634.2,3550 h30 r180
U11: Mechanical 1 "CUT / OUT" at 4634.2,2550 h30 r180
U12: Mechanical 1 "CUT / OUT" at 4634.2,1550 h30 r180
U13: Mechanical 1 "CUT / OUT" at 5695.6,3550 h30 r180
U14: Mechanical 1 "CUT / OUT" at 5695.6,2550 h30 r180
U15: Mechanical 1 "CUT / OUT" at 5695.6,1550 h30 r180
U16: Mechanical 1 "CUT / OUT" at 6757,3550 h30 r180
U17: Mechanical 1 "CUT / OUT" at 6757,2550 h30 r180
U18: Mechanical 1 "CUT / OUT" at 6757,1550 h30 r180
U19: Mechanical 1 "CUT / OUT" at 7818.4,3550 h30 r180
U20: Mechanical 1 "CUT / OUT" at 7818.4,2550 h30 r180
U21: Mechanical 1 "CUT / OUT" at 7818.4,1550 h30 r180
U22: Mechanical 1 "CUT / OUT" at 8879.8,3550 h30 r180
U23: Mechanical 1 "CUT / OUT" at 8879.8,2550 h30 r180
U24: Mechanical 1 "CUT / OUT" at 8879.8,1550 h30 r180
U25: Mechanical 1 "CUT / OUT" at 9941.2,3550 h30 r180
U26: Mechanical 1 "CUT / OUT" at 9941.2,2550 h30 r180
U27: Mechanical 1 "CUT / OUT" at 9941.2,1550 h30 r180
U28: Mechanical 1 "CUT / OUT" at 11002.6,3550 h30 r180
U29: Mechanical 1 "CUT / OUT" at 11002.6,2550 h30 r180
U30: Mechanical 1 "CUT / OUT" at 11002.6,1550 h30 r180
U31: Mechanical 1 "CUT / OUT" at 12064,3550 h30 r180
U32: Mechanical 1 "CUT / OUT" at 12064,2550 h30 r180
U33: Mechanical 1 "CUT / OUT" at 12064,1550 h30 r180